# EAGLE board untitled (EAGLE 8.7.1)
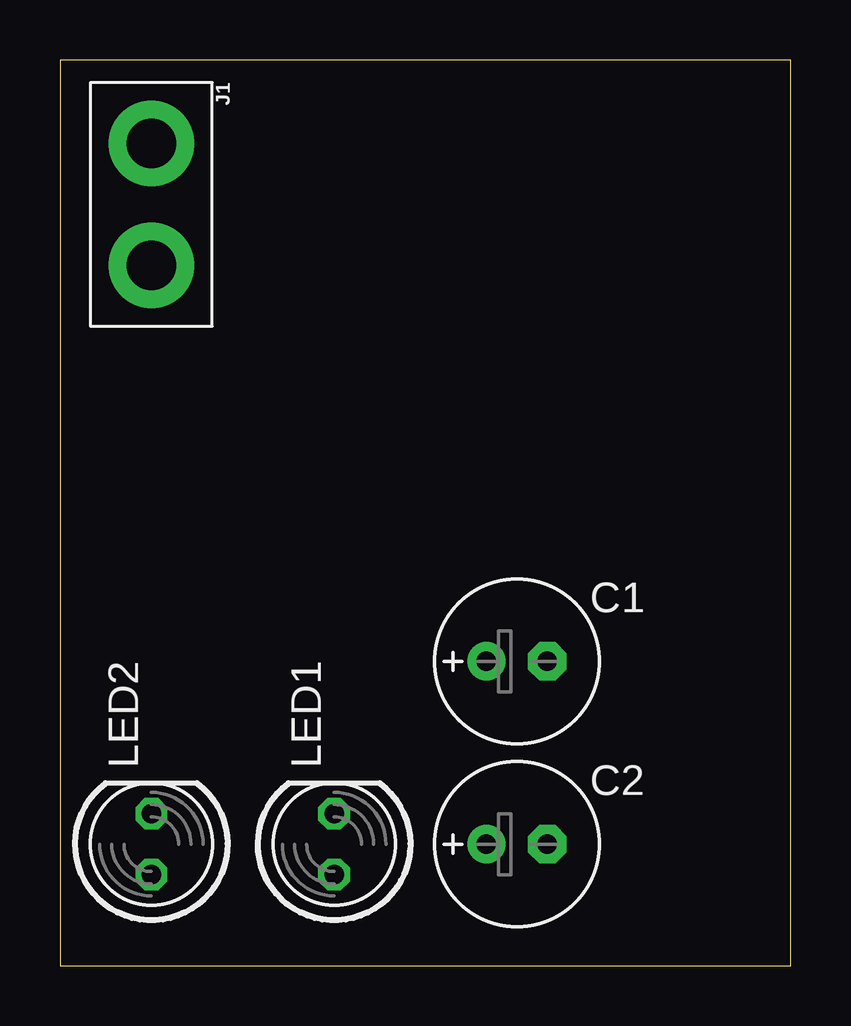
[diagram p0: board, top side]
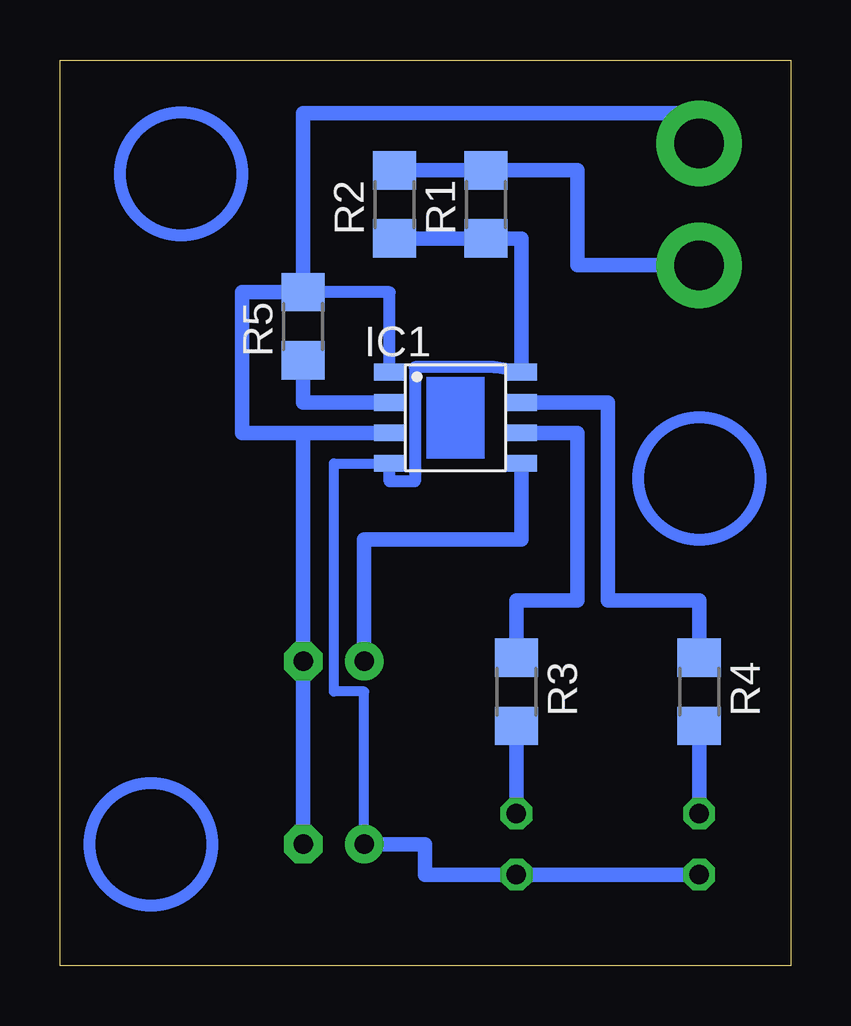
[diagram p1: board, bottom side, seen from below]

Size 30.46 x 37.77 mm. Coordinates in mm from the lower left corner, seen from the top.
Outline: 0,0 30.46,0 30.46,37.77 0,37.77 0,0
Copper layers (1*16): Top 0.035mm / dielectric 1.5mm / Bottom 0.035mm
Design rules "default": minimum track width 6mil, minimum drill 0.35mm, track to track 6mil, track to pad 6mil, pad to pad 6mil, via to via 6mil, smd to smd 6mil, copper to edge 40mil, drill to drill 6mil, minimum pad ring 10mil, minimum via ring 8mil, stop-mask expansion 4mil, vias tented up to drill 0mil, thermal gap 10mil

## Footprints (pad centres in the part's own frame; a part is rotated, then mirrored left to right if it is on the bottom)
E2,5-7 = drill 0.813 pad 1.6: + -1.27,0 | drill 0.813 pad 1.6 octagon: - 1.27,0
SOP-8 = smd 1.3 x 0.7: 1 -2.75,1.905; 2 -2.75,0.635; 3 -2.75,-0.635; 4 -2.75,-1.905; 5 2.75,-1.905; 6 2.75,-0.635; 7 2.75,0.635; 8 2.75,1.905
1X02_XTRA_BIG = drill 2.057 pad 3.556: 1 -2.54,0; 2 2.54,0
LED5MM = drill 0.813 octagon: A -1.27,0; K 1.27,0
R1206 = smd 1.6 x 1.803: 1 -1.422,0; 2 1.422,0

## Placement (x,y rotation side)
C1  [E2,5-7]  19.05,12.7 0 top
C2  [E2,5-7]  19.05,5.08 0 top
IC1  TP4056  [SOP-8]  13.97,22.86 0 bottom
J1  [1X02_XTRA_BIG]  3.81,31.75 270 top
LED1  [LED5MM]  11.43,5.08 90 top
LED2  [LED5MM]  3.81,5.08 90 top
R1  [R1206]  12.7,31.75 90 bottom
R2  [R1206]  16.51,31.75 90 bottom
R3  [R1206]  11.43,11.43 270 bottom
R4  [R1206]  3.81,11.43 270 bottom
R5  [R1206]  20.32,26.67 90 bottom

## Library data of the parts
C1 C2 = rcl; SPICEPREFIX: C
IC1 = TP4056
J1 = SparkFun-Connectors
LED1 LED2 = led
R1-R5 = resistor

## Nets
GND: C1.- C2.- IC1.1 IC1.3 J1.1 R5.2
N$1: LED2.K R4.2
N$2: LED1.K R3.2
N$3: C1.+ IC1.5
N$4: J1.2 R1.2 R2.2
N$5: C2.+ IC1.4 IC1.8 LED1.A LED2.A R1.1 R2.1
N$6: IC1.6 R3.1
N$7: IC1.7 R4.1
N$9: IC1.2 R5.1

## Tracks (layer width: path | path; a pad name or v marks a point on that pad's centre or on a via)
GND
  Bottom 0.508: IC1.1 16.72,28.09 R5.2
  Bottom 0.61: 20.32,22.23 C1.- C2.- | 20.32,22.23 IC1.3 | J1.1 3.81,35.56 20.32,35.56 R5.2 22.86,28.09 22.86,22.23 20.32,22.23
N$1
  Bottom 0.61: R4.2 LED2.K
N$2
  Bottom 0.61: R3.2 LED1.K
N$3
  Bottom 0.61: C1.+ 17.78,17.78 11.22,17.78 IC1.5
N$4
  Bottom 0.61: R2.2 R1.2 8.89,33.17 8.89,29.21 J1.2
N$5
  Bottom 0.406: C2.+ 17.78,11.44 19.04,11.44 19.04,20.95 IC1.4
  Bottom 0.508: IC1.8 11.09,24.77 12.36,24.97 15.66,24.97 15.66,20.2 16.72,20.2 IC1.4
  Bottom 0.61: R2.1 R1.1 11.22,30.33 IC1.8 | C2.+ 15.24,5.08 15.24,3.81 LED1.A LED2.A
N$6
  Bottom 0.61: R3.1 11.43,15.24 8.89,15.24 8.89,22.23 IC1.6
N$7
  Bottom 0.61: R4.1 3.81,15.24 7.62,15.24 7.62,23.5 IC1.7
N$9
  Bottom 0.61: IC1.2 20.32,23.5 R5.1
(copper drawn outside any net)
  shapes: Bottom circle x3